# Altium PCB MASTER.PcbDoc
Units mm, origin at the board's own origin, x right, y up, seen from the top; angles counter-clockwise.
Board outline 100 x 50 mm, 2 copper layers (Top Layer, Bottom Layer); 20 components, 18 nets, 67 pads, 1 vias.
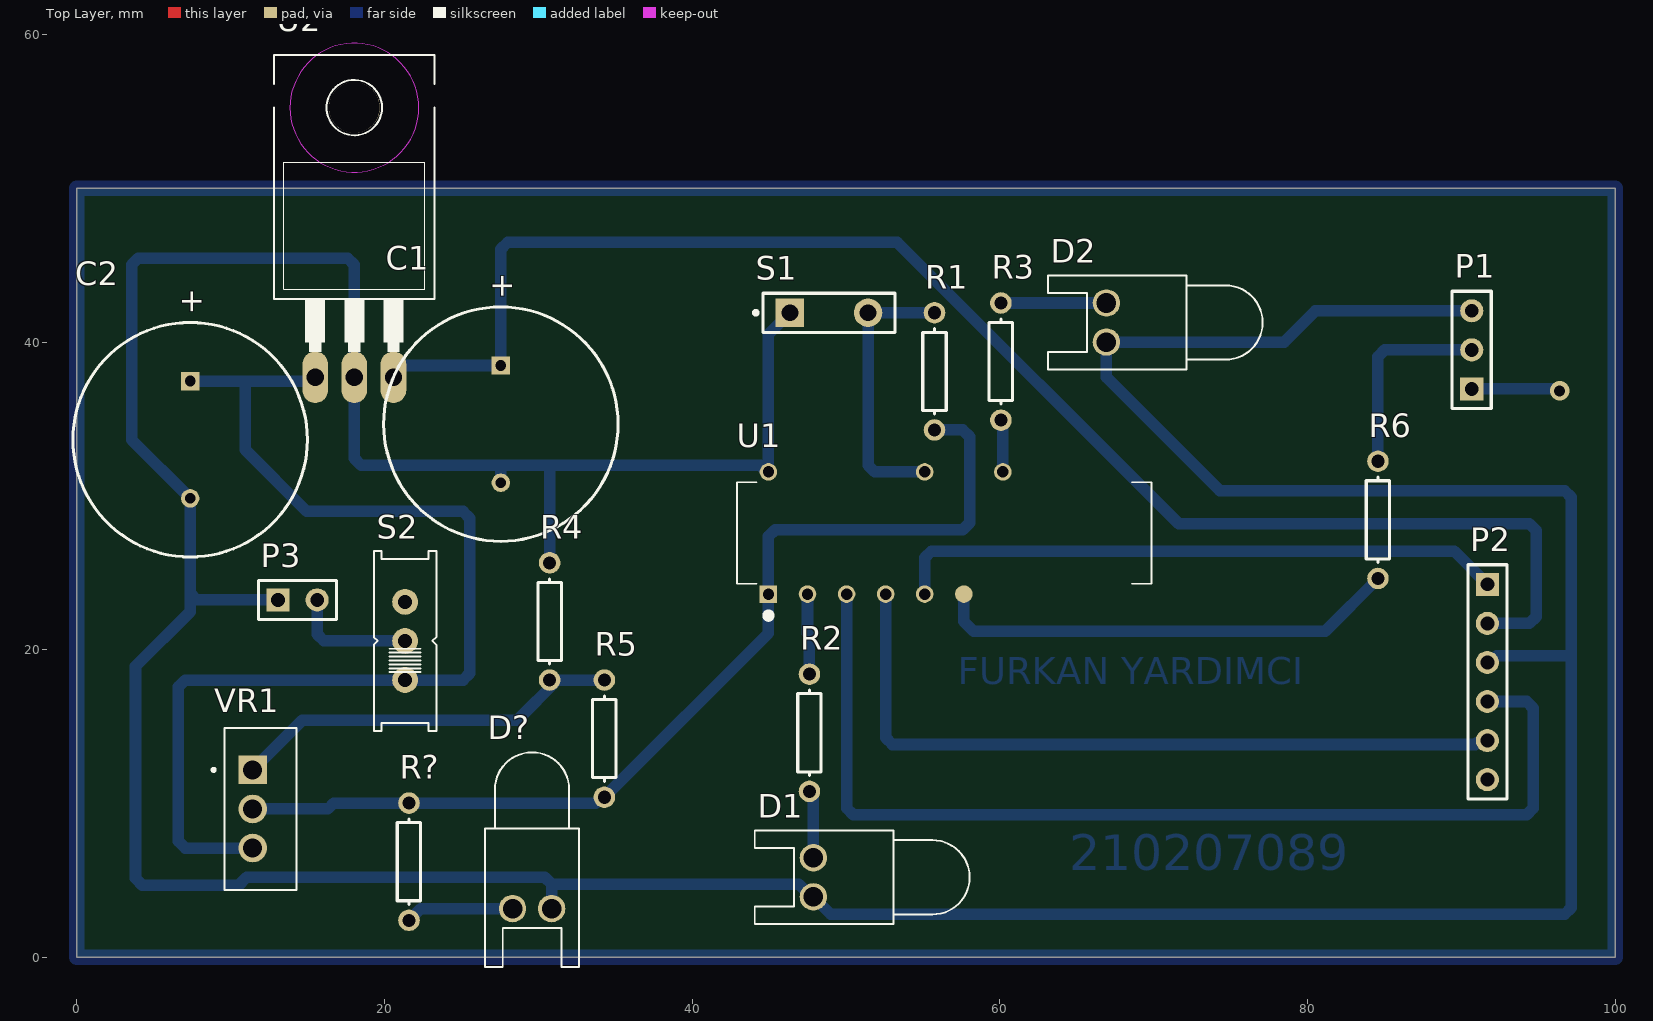
[diagram p0: Top Layer view]
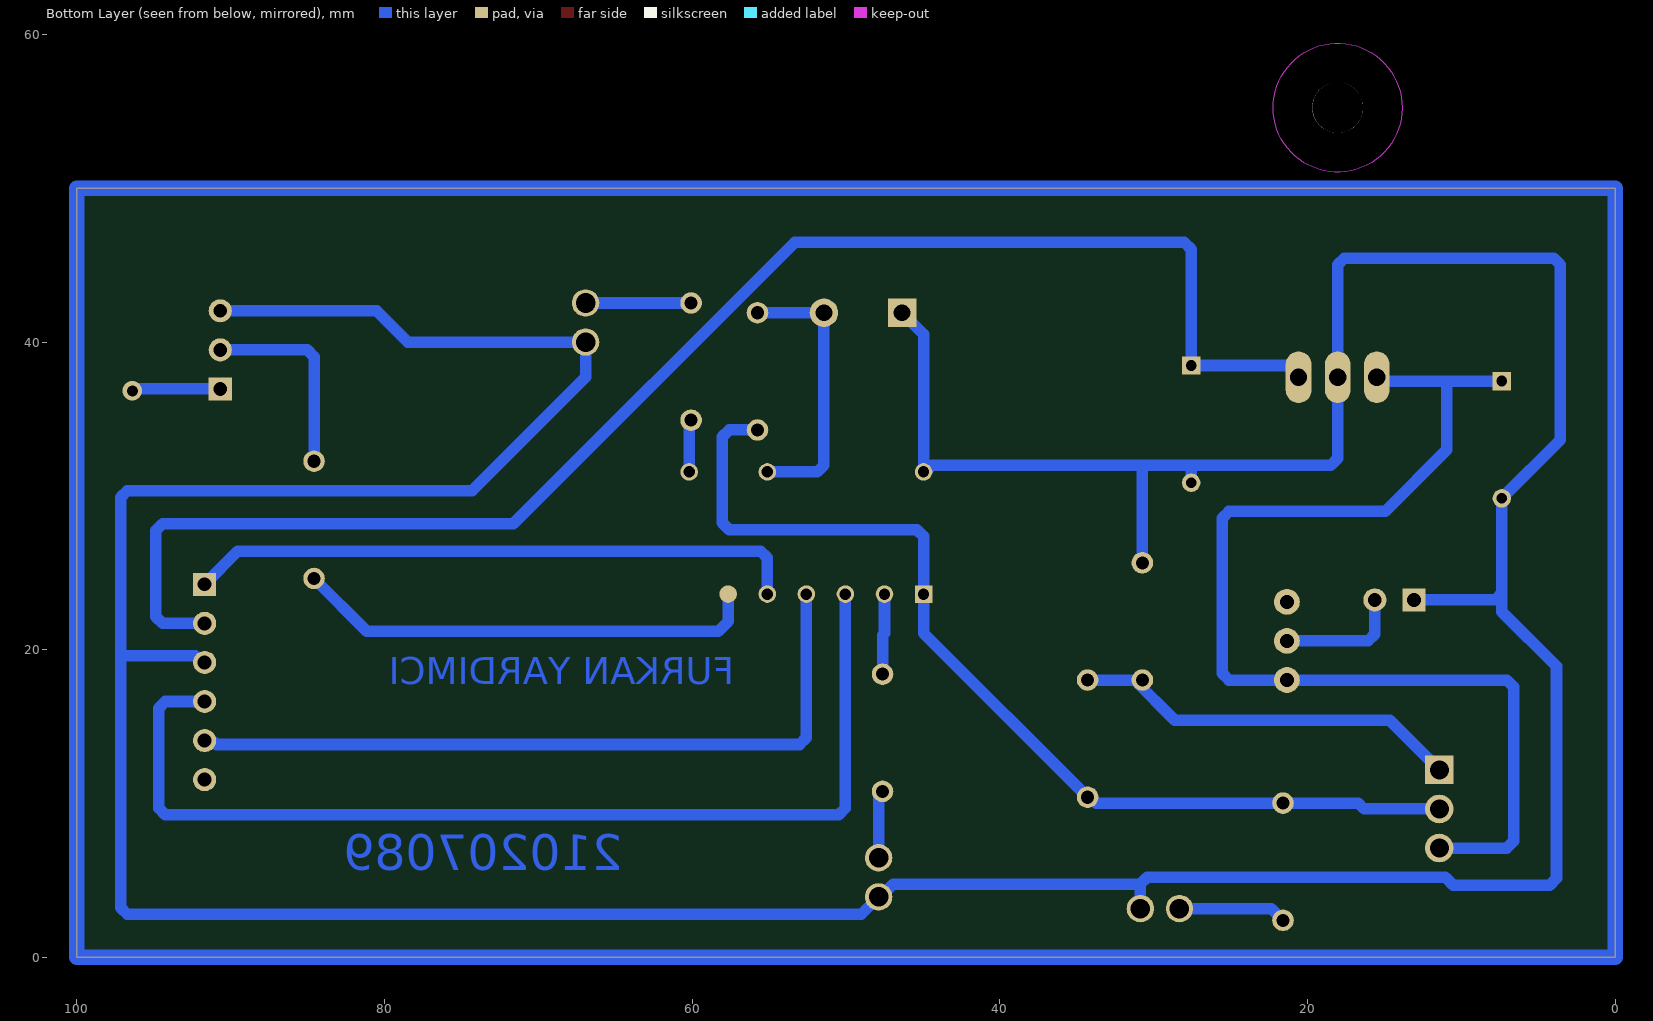
[diagram p1: Bottom Layer view, seen from below]

## Layer stack, top to bottom
Top Solder: solder mask 0.0102, Solder Resist, Dk 3.5
Top Layer: signal copper 0.0356
Dielectric 1: dielectric 0.32, FR-4, Dk 4.8
Bottom Layer: signal copper 0.0356
Bottom Solder: solder mask 0.0102, Solder Resist, Dk 3.5

## Board outline
0,0 100,0 100,50 0,50

## Design rules (kind name [scope] priority, off if disabled: settings)
Clearance [All] p1: gap=0.254 ignorepadtopadclearanceinfootprint=FALSE except(0: Arc-Hole Track-Hole SMDPad-Hole THPad-Hole Via-Hole Fill-Hole Poly-Hole Region-Hole Text-Hole)
PolygonConnect [All] p1: connectstyle=Relief reliefconductorwidth=0.254 reliefentries=4 polygonreliefangle="90 Angle" airgapwidth=0.254
RoutingVias [All] p1: holewidth=0.711 width=1.27 viastyle="Through Hole" minholewidth=0.711 minwidth=1.27 maxholewidth=0.711 maxwidth=1.27
SolderMaskExpansion [All] p1: expansion=0.102 istentingtop=FALSE
Width [All] p1: maxlimit=1 minlimit=0.7 preferedwidth=0.75 minimp=50.000000 maximp=50.000000 favimp=50.000000
30 further rules are at their usual default settings.

## Components (designator, comment, footprint, x,y, rotation, side; value= is the part's Value field where it differs from the comment)
C1 "Cap Pol1" RB7.6-15 27.559,34.671 r90 top value=0.1
C2 "Cap Pol1" RB7.6-15 7.366,33.655 r90 top value=0.1
D1 "LED0" LED-0 47.879,5.207 r90 top
D2 "LED0" LED-0 66.929,41.275 r90 top
D? "LED0" LED-0 29.591,3.175 r180 top
P1 "BJT" HDR1X3 90.678,36.957 r90 top
P2 "hc05" HDR1X6 91.694,24.257 r270 top
P3 "Header 2" HDR1X2 13.081,23.241 r0 top
R1 "Res1" AXIAL-0.3 55.753,38.1 r90 top value=47k
R2 "Res1" AXIAL-0.3 47.625,14.605 r90 top value=1K
R3 "Res1" AXIAL-0.3 60.071,38.735 r270 top value=1K
R4 "Res1" AXIAL-0.3 30.734,21.844 r90 top value=390
R5 "Res1" AXIAL-0.3 34.29,14.224 r270 top value=220
R6 "Res1" AXIAL-0.3 84.582,28.448 r270 top value=10K
R? "Res1" AXIAL-0.3 21.59,6.223 r90 top value=1K
S1 "SW-PB" SPST-2 48.895,41.91 r0 top
S2 "EG1218" EG1218 21.336,20.574 r90 top
U1 "MSP430G2553IN20" DIP794W45P254L2692H508Q20 56.388,27.592 r90 top
U2 "LM7805" TO220 18.034,44.069 r0 top
VR1 "LM317T" TO254P1054X470X1955-3 11.43,9.652 r270 top

## Footprints (in the part's own frame and the unit in brackets; to place one, negate y for a bottom-side part, rotate by r counter-clockwise, add the part's x,y. Pads: shape width x height; smd on the part's side, far side on the other; paste and mask are expansions set on the pad)
AXIAL-0.3 [mm] "Axial Device, Thru-Hole; 2 Leads; 0.3 in Pin Spacing"
  round 1.4 hole 0.85: 1(-3.81,0) 2(3.81,0)
  silkscreen extent -2.77,-0.76 2.77,0.76
DIP794W45P254L2692H508Q20 [mm]
  rect 1.14x1.14 hole 0.74: 1(-3.97,11.43)
  round 1.14 hole 0.74: 2(-3.97,8.89) 3(-3.97,6.35) 4(-3.97,3.81) 5(-3.97,1.27) 14(3.97,-3.81) 16(3.97,1.27) 20(3.97,11.43)
  round 1.14 all layers, no hole: 6(-3.97,-1.27)
  round 1.14 on Mech1: 7(-3.97,-3.81) 8(-3.97,-6.35) 9(-3.97,-8.89) 10(-3.97,-11.43) 11(3.97,-11.43) 12(3.97,-8.89) 13(3.97,-6.35) 15(3.97,-1.27) 17(3.97,3.81) 18(3.97,6.35) 19(3.97,8.89)
  silkscreen extent -5.57,-13.46 3.3,13.46
EG1218 [mil]
  round 66 hole 35.43: O(-100,0) P(0,0) S(100,0)
  silkscreen extent -230,-80 230,80
HDR1X2 [mm] "Connector; Header; 2 Position"
  rect 1.5x1.5 hole 0.9: 1(0,0)
  round 1.5 hole 0.9: 2(2.54,0)
  silkscreen extent -1.27,-1.27 3.81,1.27
HDR1X3 [mm] "Connector; Header; 3 Position"
  rect 1.5x1.5 hole 0.9: 1(0,0)
  round 1.5 hole 0.9: 2(2.54,0) 3(5.08,0)
  silkscreen extent -1.27,-1.27 6.35,1.27
HDR1X6 [mm] "Connector; Header; 6 Position"
  rect 1.5x1.5 hole 0.9: 1(0,0)
  round 1.5 hole 0.9: 2(2.54,0) 3(5.08,0) 4(7.62,0) 5(10.16,0) 6(12.7,0)
  silkscreen extent -1.27,-1.27 13.97,1.27
LED-0 [mil] "LED; 2 Leads"
  round 70 hole 50: 1(50,0) 2(-50,0)
  silkscreen extent -120,-400 120,150
RB7.6-15 [mm] "Polarized Capacitor (Radial); 2 Leads"
  rect 1.2x1.2 hole 0.7: 1(3.81,0)
  round 1.2 hole 0.7: 2(-3.81,0)
  silkscreen extent -7.62,-7.62 7.62,7.62
SPST-2 [mm] "Switch; 2 Leads"
  rect 1.85x1.85 hole 1.1: 1(-2.54,0)
  round 1.85 hole 1.1: 2(2.54,0)
  silkscreen extent -4.89,-1.27 4.28,1.27
TO220 [mil]
  oval 66x132 hole 44: 1(-100,-250) 2(0,-250) 3(100,-250)
  round 130 hole 130 unplated: ""(0,440)
  Keep-Out Layer circle w0: c0,440 r165
  Keep-Out Layer circle w0: c0,440 r165
  silkscreen extent -205,-185 205,575
TO254P1054X470X1955-3 [mm]
  rect 1.86x1.86 hole 1.24: 1(-2.54,0)
  round 1.86 hole 1.24: 2(0,0) 3(2.54,0)
  silkscreen extent -5.27,-2.64 5.27,2.86

## Part data
C1 C2: "Polarized Capacitor (Radial)", LatestRevisionDate=17-Jul-2002, LatestRevisionNote="Re-released for DXP Platform.", PackageDescription="Polarized Capacitor (Radial); 2 Leads", PackageReference=RB7.6-15, Published=8-Jun-2000, Publisher="Altium Limited"
D1 D2 D?: "Typical INFRARED GaAs LED", LatestRevisionDate=08-Jul-2005, LatestRevisionNote="Mech Layer 1 removed.", PackageDescription="LED; 2 Leads", PackageReference=LED-0, Published=8-Jun-2000, Publisher="Altium Limited"
P1: library part "Header 3", "Header, 3-Pin", LatestRevisionDate=17-Jul-2002, LatestRevisionNote="Re-released for DXP Platform.", Publisher="Altium Limited"
P2: library part "Header 6", "Header, 6-Pin", LatestRevisionDate=17-Jul-2002, LatestRevisionNote="Re-released for DXP Platform.", Publisher="Altium Limited"
P3: "Header, 2-Pin", LatestRevisionDate=17-Jul-2002, LatestRevisionNote="Re-released for DXP Platform.", Publisher="Altium Limited"
R1 R2 R3 R4 R5 R6 R?: "Resistor", LatestRevisionDate=17-Jul-2002, LatestRevisionNote="Re-released for DXP Platform.", PackageDescription="Axial Device, Thru-Hole; 2 Leads; 0.3 in Pin Spacing", PackageReference=AXIAL-0.3, Published=8-Jun-2000, Publisher="Altium Limited"
S1: "Switch", LatestRevisionDate=17-Jul-2002, LatestRevisionNote="Re-released for DXP Platform.", PackageDescription="Switch; 2 Leads", PackageReference=SPST-2, Published=24-Mar-1999, Publisher="Altium Limited"
S2: "æ»‘å‹•é–‹é—œSPDTé€šå­”", Package="Custom package E-Switch", Availability=Unavailable, MF=E-Switch, MP=EG1218, Price=None, SnapEDA_Link=https://www.snapeda.com/parts/EG1218/E-Switch/view-part/13895/?ref=snap
U1: "MSP430 MSP430G2xx Microcontroller IC 16-Bit 16MHz 16KB _16K x 8_ FLASH 20-PDIP", Package="PDIP-20 Texas Instruments", Availability=Unavailable, MF="Texas Instruments", MP=MSP430G2553IN20, Price=None, SnapEDA_Link=https://www.snapeda.com/parts/MSP430G2553IN20/Texas%20Instruments/view-part/46372/?ref=snap
U2: "Linear Voltage Regulator IC 1 Output 1.5A SOT-223-4", Package="TO-220 Texas Instruments", Availability=Unavailable, MF="Texas Instruments", MP=LM7805, Price=None, SnapEDA_Link=https://www.snapeda.com/parts/LM7805/Texas%20Instruments/view-part/2302466/?ref=snap
VR1: "1.5-A, 40-V, adjustable linear voltage regulator 3-TO-220", Package="TO-220-3 Texas Instruments", Arrow_Electronics-Purchase-URL=https://snapeda.com/shop?store=Arrow+Electronics&id=2756289, Availability=Unavailable, DigiKey-Purchase-URL=https://snapeda.com/shop?store=DigiKey&id=2756289, MF="Texas Instruments", Mouser-Purchase-URL=https://snapeda.com/shop?store=Mouser&id=2756289, MP=LM317T, Price=None, SnapEDA_Link=https://www.snapeda.com/parts/LM317T/Texas%20Instruments/view-part/2756289/?ref=snap

## Via types
v1: diameter 1.27, hole 0.711, Top Layer to Bottom Layer, 1 vias

## Nets (pads, with @x,y where several pads share a name; then routed paths per layer and width w, separated by ;. In a path a pad name is that pad's centre, name@x,y a point inside that pad or via, vN(x,y) a via of type N, cw(c..) or ccw(c..) an arc to the next point about the centre after c; other vN are vias at no path point)
GND: C1.2 C2.2 D1.2 D2.2 D?.2 P1.3 P2.3 P3.1 R4.2 S1.1 U1.20 U2.2 | length 310.8
  Bottom Layer w0.75: P3.1 7.805,23.241 7.366,23.68 ; C1.2 27.559,32.004 ; R4.2 30.734,31.75 ; D?.2 30.861,4.768 ; S1.1 44.958,40.513 U1.20 44.852,31.562 44.41,32.004 30.734,32.004 27.559,32.004 ; D1.2@47.756,3.937 46.926,4.768 30.861,4.768 ; D1.2 49.022,2.794 96.716,2.794 97.155,3.233 97.155,19.6 ; P1.3 80.518,42.037 78.486,40.005 D2.2 66.929,37.719 74.295,30.353 96.716,30.353 97.155,29.914 97.155,19.6 ; P2.3 91.897,19.177 92.32,19.6 97.155,19.6 ; 7.366,23.68 7.366,22.479 3.81,18.923 3.81,5.138 4.249,4.699 10.521,4.699 11.029,5.207 30.422,5.207 30.861,4.768 ; 7.366,23.68 C2.2 3.556,33.655 3.556,45.027 3.995,45.466 17.595,45.466 18.034,45.027 U2.2 18.034,32.443 18.473,32.004 27.559,32.004
NetC1_1: C1.1 P2.2 U2.3 | length 99.5
  Bottom Layer w0.75: U2.3 20.574,38.481 C1.1 27.559,46.043 27.998,46.482 53.34,46.482 71.628,28.194 94.43,28.194 94.869,27.755 94.869,22.156 94.43,21.717 P2.2
NetC2_1: C2.1 S2.O U2.1 VR1.3 | length 73.7
  Bottom Layer w0.75: C2.1 10.947,37.465 ; VR1.3 7.043,7.112 6.604,7.551 6.604,17.595 7.043,18.034 S2.O 25.107,18.034 25.547,18.473 25.547,28.553 25.107,28.993 14.949,28.993 10.947,32.995 10.947,37.465 ; U2.1 15.494,37.465 10.947,37.465
NetD1_1: D1.1 R2.1 | length 4.4
  Bottom Layer w0.75: R2.1 47.625,10.619 47.879,10.365 D1.1
NetD2_1: D2.1 R3.1 | length 6.9
  Bottom Layer w0.75: R3.1 D2.1
NetD?_1: D?.1 R?.1 | length 7
  Bottom Layer w0.75: R?.1 22.352,3.175 D?.1
NetP1_1: P1.1 | length 5.8
  Bottom Layer w0.75: P1.1 96.266,36.957 v1(96.393,36.83)
NetP1_2: P1.2 R6.1 | length 13.1
  Bottom Layer w0.75: R6.1 84.582,39.058 85.021,39.497 P1.2
NetP2_1: P2.1 U1.5 | length 40
  Bottom Layer w0.75: U1.5 55.118,25.977 55.557,26.416 89.535,26.416 P2.1
NetP2_4: P2.4 U1.3 | length 68.6
  Bottom Layer w0.75: U1.3 50.038,9.71 50.477,9.271 94.246,9.271 94.685,9.71 94.685,16.198 94.246,16.637 P2.4
NetP2_5: P2.5 U1.4 | length 48.7
  Bottom Layer w0.75: U1.4 52.578,14.282 53.017,13.843 90.91,13.843 91.02,13.953 91.55,13.953 P2.5
NetP3_2: P3.2 S2.P | length 8.1
  Bottom Layer w0.75: P3.2 15.621,21.013 16.06,20.574 S2.P
NetR1_1: R1.1 R5.2 R?.2 U1.1 VR1.2 | length 66.1
  Bottom Layer w0.75: VR1.2 16.32,9.652 16.701,10.033 R?.2 33.733,10.033 34.114,10.414 R5.2 44.958,21.082 U1.1 44.958,27.374 45.397,27.813 57.6,27.813 58.039,28.252 58.039,33.851 57.6,34.29 R1.1
NetR1_2: R1.2 S1.2 U1.16 | length 18
  Bottom Layer w0.75: U1.16 51.874,31.562 51.435,32.001 S1.2 R1.2@55.626,41.91
NetR2_2: R2.2 U1.2 | length 5.3
  Bottom Layer w0.75: U1.2 47.498,21.082 47.625,20.955 R2.2
NetR3_2: R3.2 U1.14 | length 3.4
  Bottom Layer w0.75: R3.2 60.071,34.749 60.198,34.622 U1.14
NetR4_1: R4.1 R5.1 VR1.1 | length 25.3
  Bottom Layer w0.75: VR1.1 14.656,15.418 28.626,15.418 31.242,18.034 R5.1
NetR6_2: R6.2 U1.6 | length 30.4
  Bottom Layer w0.75: U1.6 57.658,21.844 58.293,21.209 81.153,21.209 R6.2
pads on no net: P2.6 S2.S U1.7 U1.8 U1.9 U1.10 U1.11 U1.12 U1.13 U1.15 U1.17 U1.18 U1.19 U2.
copper on no net: | length 300
  Bottom Layer w1: 0,0 100,0 100,50 0,50 0,0

## Other copper
Bottom Layer:
  text "FURKAN YARDIMCI" at 57.277,17.181 h3
  text "210207089" at 64.516,4.874 h4

## Text inside footprints (layer, text, board x,y; h text height)
C1: Top Overlay "+" at 28.296,42.803 h1.5 r90
C2: Top Overlay "+" at 8.103,41.787 h1.5 r90
U2: Mechanical 13 "1" at 14.853,44.069 h1.27; Mechanical 13 "2" at 17.398,44.069 h1.27; Mechanical 13 "3" at 19.939,44.069 h1.27